# EAGLE board Select Fire Rapidstrike (EAGLE 9.4.2)
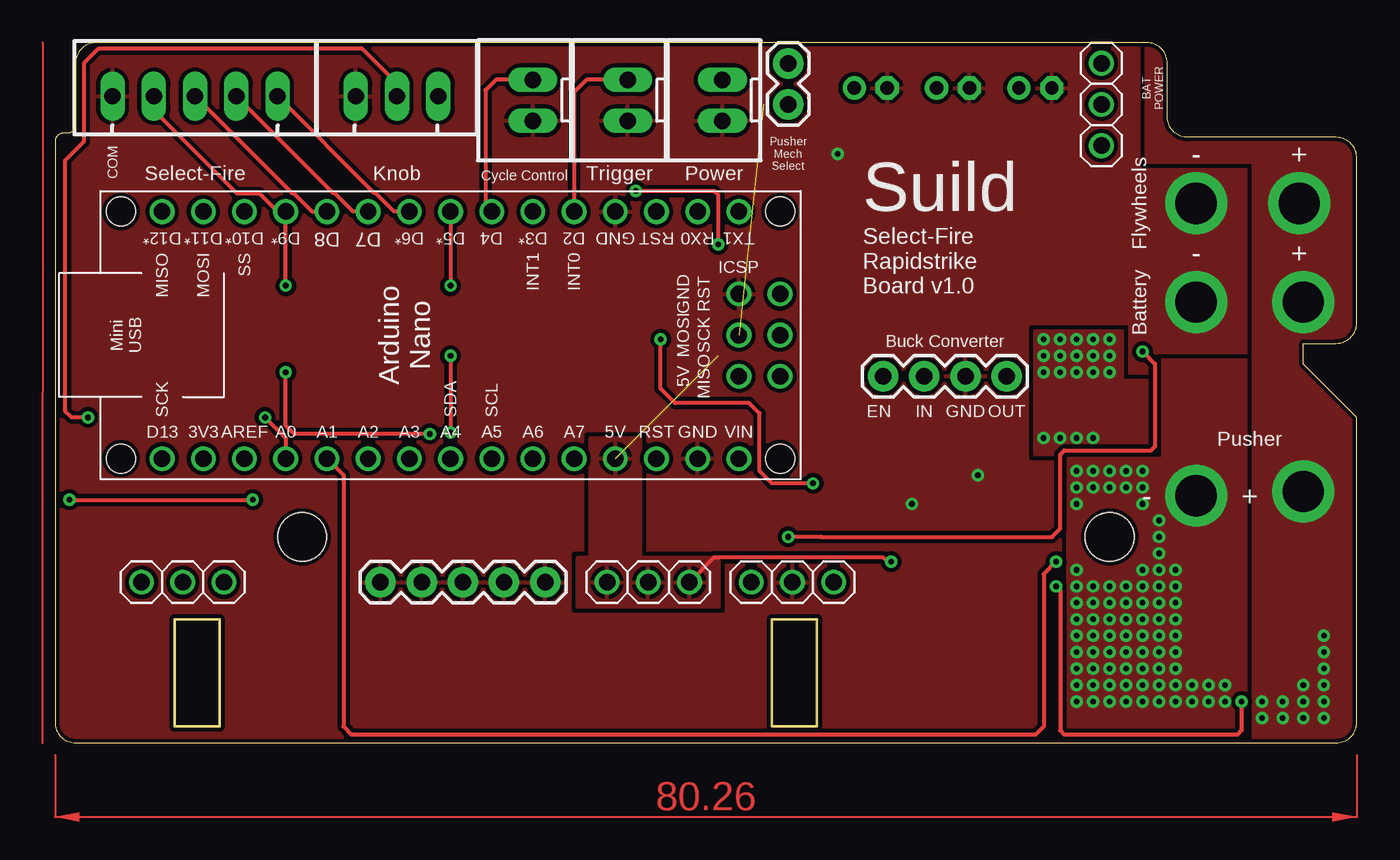
[diagram p0: board, top side]
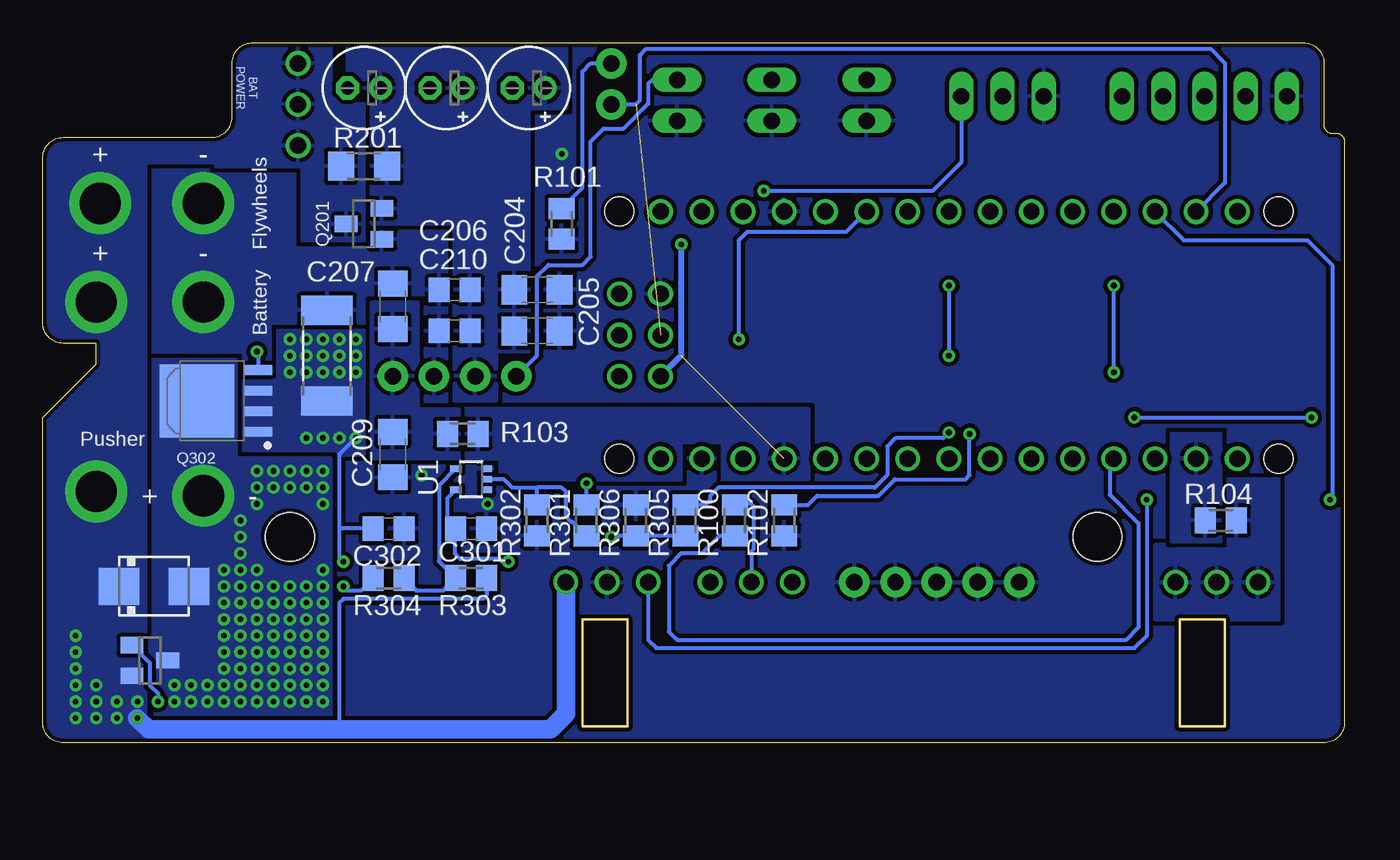
[diagram p1: board, bottom side, seen from below]

Size 80.26 x 43.18 mm. Coordinates in mm from the lower left corner, seen from the top.
Outline: 0.76,37.59 0.51,37.59 arc90 0,37.08 0,1.27 arc90 1.27,0 78.99,0 arc90 80.26,1.27 80.26,20.07 76.96,23.37 76.96,24.64 78.99,24.64 arc90 80.26,25.91 80.26,36.07 arc90 78.99,37.34 69.85,37.34 arc-90 68.58,38.61 68.58,41.91 arc90 67.31,43.18 2.54,43.18 arc90 1.27,41.91 1.27,38.1 arc-90 0.76,37.59
Outline: 7.37,7.62 10.16,7.62 10.16,1.02 7.37,1.02 7.37,7.62
Outline: 44.2,7.62 46.99,7.62 46.99,1.02 44.2,1.02 44.2,7.62
Copper layers (1*16): Top 0.035mm / dielectric 1.5mm / Bottom 0.035mm
Design rules "default *": minimum track width 10mil, minimum drill 0.35mm, track to track 10mil, track to pad 10mil, pad to pad 10mil, via to via 10mil, smd to smd 10mil, copper to edge 10mil, drill to drill 10mil, minimum pad ring 10mil, minimum via ring 8mil, stop-mask expansion 4mil, vias tented up to drill 30mil, thermal gap 10mil

## Footprints (pad centres in the part's own frame; a part is rotated, then mirrored left to right if it is on the bottom)
E2-5 = drill 0.813 pad 1.422: + -1.016,0 | drill 0.813 pad 1.422 octagon: - 1.016,0
C1206 = smd 1.6 x 1.8: 1 -1.4,0; 2 1.4,0
C0805 = smd 1.3 x 1.5: 1 -0.95,0; 2 0.95,0
DO214AA = smd 2.5 x 2.3: A 2.15,0; C -2.15,0
MOUNT-HOLE-2.5MM = drill 2.54 pad 3.81: P$1 0,0
UNPLATED_MOUNT_HOLE_3MM = hole 3: 0,0
1X04 = drill 1.016 pad 1.88: 1 0,0; 2 2.54,0; 3 5.08,0; 4 7.62,0
JST-XH-02-PACKAGE-LONG-PAD = drill 1.016 long: 1 -1.27,0; 2 1.27,0
JST-XH-03-PACKAGE-LONG-PAD = drill 1.016 long: 1 -2.54,0; 2 0,0; 3 2.54,0
JST-XH-05-PACKAGE-LONG-PAD = drill 1.016 long: 1 -5.08,0; 2 -2.54,0; 3 0,0; 4 2.54,0; 5 5.08,0
1X02 = drill 1.016 pad 1.88: 1 0,0; 2 2.54,0
1X03 = drill 1.016: 1 -2.54,0; 2 0,0; 3 2.54,0
1X05 = drill 1.016 pad 1.88: 1 0,0; 2 2.54,0; 3 5.08,0; 4 7.62,0; 5 10.16,0
SOT-23 = smd 1 x 1.4: 1 -0.95,-1.1; 2 0.95,-1.1; 3 0,1.1
TO127P600X120-5N = smd 1.65 x 0.6: 1 -2.65,1.905; 2 -2.65,0.635; 3 -2.65,-0.635; 4 -2.65,-1.905 | smd 4.6 x 4.5: 5 1.15,0
M0805 = smd 1.3 x 1.6: 1 -0.95,0; 2 0.95,0
R1206 = smd 1.6 x 1.803: 1 -1.422,0; 2 1.422,0
R2512 = smd 1.8 x 3.2: 1 -2.8,0; 2 2.8,0
SOT353 = smd 0.42 x 0.7: 1 -0.65,-0.95; 2 0,-0.95; 3 0.65,-0.95; 4 0.65,0.95; 5 -0.65,0.95
ARDUINO_NANO = drill 1.016: P1 -7.62,16.51; P2 -7.62,13.97; P3 -7.62,11.43; P4 -7.62,8.89; P5 -7.62,6.35; P6 -7.62,3.81; P7 -7.62,1.27; P8 -7.62,-1.27; P9 -7.62,-3.81; P10 -7.62,-6.35; P11 -7.62,-8.89; P12 -7.62,-11.43; P13 -7.62,-13.97; P14 -7.62,-16.51; P15 -7.62,-19.05; P16 7.62,-19.05; P17 7.62,-16.51; P18 7.62,-13.97; P19 7.62,-11.43; P20 7.62,-8.89; P21 7.62,-6.35; P22 7.62,-3.81; P23 7.62,-1.27; P24 7.62,1.27; P25 7.62,3.81; P26 7.62,6.35; P27 7.62,8.89; P28 7.62,11.43; P29 7.62,13.97; P30 7.62,16.51; P31 -2.54,19.05; P32 -2.54,16.51; P33 0,19.05; P34 0,16.51; P35 2.54,19.05; P36 2.54,16.51 | hole 1.778: -7.62,19.05; 7.62,19.05; -7.62,-21.59; 7.62,-21.59

## Placement (x,y rotation side)
C201  47uF  [E2-5]  60.45,40.39 180 bottom
C202  47uF  [E2-5]  55.37,40.39 180 bottom
C203  47uF  [E2-5]  50.29,40.39 180 bottom
C204  10uF  [C1206]  49.78,27.94 0 bottom
C205  10uF  [C1206]  49.78,25.4 0 bottom
C206  1uF  [C0805]  54.86,27.94 180 bottom
C207  10uF  [C1206]  58.67,26.92 90 bottom
C209  10uF  [C1206]  58.67,17.78 270 bottom
C210  0.1uF  [C0805]  54.86,25.4 180 bottom
C301  0.1uF  [C0805]  53.85,13.21 0 bottom
C302  0.1uF  [C0805]  58.93,13.21 0 bottom
D301  [DO214AA]  73.41,9.65 0 bottom
H1  B+  [MOUNT-HOLE-2.5MM]  76.71,33.27 0 top
H2  B-  [MOUNT-HOLE-2.5MM]  70.36,27.18 0 top
H3  M+  [MOUNT-HOLE-2.5MM]  76.96,15.49 0 bottom
H4  M+  [MOUNT-HOLE-2.5MM]  70.36,33.27 0 top
H0205  UNPLATED_MOUNT_HOLE_3MM  [UNPLATED_MOUNT_HOLE_3MM]  65.02,12.7 0 top
H0206  UNPLATED_MOUNT_HOLE_3MM  [UNPLATED_MOUNT_HOLE_3MM]  15.24,12.7 0 top
H0301  M+  [MOUNT-HOLE-2.5MM]  76.96,27.18 0 top
H308  M-  [MOUNT-HOLE-2.5MM]  70.36,15.24 0 top
J1  BUCK  [1X04]  51.05,22.61 0 top
J2  POWER  [JST-XH-02-PACKAGE-LONG-PAD]  41.15,39.62 90 top
J3  POT  [JST-XH-03-PACKAGE-LONG-PAD]  21.08,39.88 0 top
J4  TRIGGER  [JST-XH-02-PACKAGE-LONG-PAD]  35.31,39.62 90 top
J5  CYCLE CONTROL  [JST-XH-02-PACKAGE-LONG-PAD]  29.46,39.62 90 top
J6  SELECT FIRE  [JST-XH-05-PACKAGE-LONG-PAD]  8.64,39.88 0 top
J7  PUSHER MECH SEL  [1X02]  45.21,41.91 270 top
J8  [1X03]  45.47,9.91 180 top
J0206  [1X03]  64.52,39.37 270 top
J0208  [1X03]  36.58,9.91 180 top
J0209  [1X03]  7.87,9.91 0 top
J0210  [1X05]  20.07,9.91 0 top
Q201  SSM3J358RLFCT-ND  [SOT-23]  60.45,32 90 bottom
Q301  SSM3J358RLFCT-ND  [SOT-23]  73.66,5.08 270 bottom
Q302  PSMN1R5-30YLC  [TO127P600X120-5N]  69.6,21.08 180 bottom
R100  470k  [M0805]  37.59,13.72 90 bottom
R101  10k  [M0805]  48.26,32 90 bottom
R102  2.2k  [M0805]  34.54,13.72 90 bottom
R103  0  [M0805]  54.36,19.05 0 bottom
R104  0  [M0805]  7.62,13.72 0 bottom
R201  0  [R1206]  60.45,35.56 0 bottom
R301  100  [M0805]  46.74,13.72 270 bottom
R302  2.2k  [M0805]  49.78,13.72 90 bottom
R303  2.2k  [M0805]  53.85,10.16 0 bottom
R304  100  [M0805]  58.93,10.16 180 bottom
R305  100  [M0805]  40.64,13.72 270 bottom
R306  2.2k  [M0805]  43.69,13.72 270 bottom
R307  0.01  [R2512]  62.74,23.88 270 bottom
U1  74LVC1G07""  [SOT353]  53.85,16.26 90 bottom
U2  ARDUINO_NANO  [ARDUINO_NANO]  25.65,25.15 270 top

## Library data of the parts
C201-C203 J8 J0206 J0208 J0209 R100-R104 R301-R306 = adafruit
C204 C205 C207 C209 = eagle-ltspice; SPICEMODEL: NONE; SPICEPREFIX: C
C206 C210 C301 C302 = rcl; SPICEPREFIX: C
D301 = s2x_10; MF: Fairchild; MPN: S2A; OC_FARNELL: 1467485; OC_NEWARK: 58K2391
H1-H4 H0205 H0206 H0301 H308 Q302 U1 U2 = my-eagle-lib
J1 = SparkFun-Connectors; PROD_ID: CONN-09696
J2-J6 = Rembrandt Electronics - JST XH Connectors v1-0
J7 J0210 = SparkFun-Connectors
Q201 Q301 = bt_transistor
R201 = adafruit; STUFF: NO STUFF
R307 = adafruit; POWER: 2W

## Nets
BUCK_EN: J1.1 J2.2
CYC_CTRL_IN: J5.2 U2.P7
GND: C201.- C202.- C203.- C204.2 C205.2 C206.2 C207.2 C209.2 C210.2 C301.2 C302.2 H2.P$1 H4.P$1 J1.3 J2.1 J3.1 J4.1 J5.1 J6.1 J8.2 J0210.1 J0210.2 J0210.3 J0210.4 J0210.5 Q201.1 R101.1 R102.1 R302.1 R306.1 R307.1 U1.3 U2.P4 U2.P29 U2.P32
HI_SIDE_GATE: Q301.1 R304.2
HI_SIDE_GATE_R: R303.1 R304.1 U1.4
I_SENSE: C302.1 Q302.1 Q302.2 Q302.3 R307.2 U2.P20
LOW_SIDE_GATE: Q302.4 R305.2 R306.2
MOSFET_BOARD_GATE: J8.3 U2.P13
MOTOR_BRAKE: R301.1 U2.P6
MOTOR_DRIVE: R305.1 U2.P8
POT_IN: J3.2 R100.1 U2.P19
PP3V3_AR: J0209.1 J0209.2 J0209.3 R104.2
PP3V3_AR_R: R104.1 U2.P17
PP5V0_AR: C301.1 J3.3 J0208.1 J0208.2 J0208.3 R100.2 R103.2 U1.5 U2.P27 U2.P36
PP5V0_BUCK: C207.1 C209.1 J1.4 R103.1
PP_BATT_MAIN: C201.+ C202.+ C203.+ C204.1 C205.1 C206.1 C210.1 J1.2 Q201.2 R201.2
PP_BATT_RAW: D301.C H1.P$1 H3.P$1 H0301.P$1 J8.1 J0206.1 J0206.2 J0206.3 Q201.3 Q301.2 R201.1 R303.2
PUSHER_MECH_SEL: J7.2 U2.P14 U2.P34
PUSHER_MECH_SEL_PD: J7.1 R101.2
PUSHER_NEG: D301.A H308.P$1 Q301.3 Q302.5
SEL_FR_<0>: J6.5 U2.P9
SEL_FR_<1>: J6.4 U2.P10
SEL_FR_<2>: J6.3 U2.P11
SEL_FR_<3>: J6.2 R102.2 U2.P12
TRIG_IN: J4.2 U2.P5
U1_IN: R301.2 R302.2 U1.2

## Tracks (layer width: path | path; a pad name or v marks a point on that pad's centre or on a via)
BUCK_EN
  Bottom 0.254: J1.1 49.78,23.88 49.78,28.78 49.09,29.47 46.99,29.47 46.48,29.98 46.48,37.08 45.68,37.89 44.45,37.89 42.93,39.41 42.93,40.64 42.67,40.89 J2.2
CYC_CTRL_IN
  Top 0.254: J5.2 27.18,40.89 26.54,40.26 26.54,33.15 U2.P7
GND  (via drill 0.35)
  other vias: 52.83,14.73 56.9,16.51 48.26,36.32
  pour Top (rank 6): -3.56,-3.56 -3.56,48.26 87.88,48.26 87.88,-3.56
  pour Bottom (rank 6): -3.81,48.51 88.14,48.51 88.14,-3.81 -3.81,-3.81
  pour Bottom (rank 6, no thermals): 70.36,24.89 68.07,24.89 68.07,35.56 73.66,35.56 73.66,24.89
  pour Top (rank 6, no thermals): 68.07,24.89 73.66,24.89 73.66,35.56 68.07,35.56
HI_SIDE_GATE  (via drill 0.35)
  Top 0.254: v73.15,2.54 73.15,0.76 72.9,0.51 62.23,0.51 61.98,0.76 61.98,9.4 v61.72,9.65
  Bottom 0.254: Q301.1 73.66,4.93 73.66,3.56 73.15,3.05 v73.15,2.54 | R304.2 60.64,9.4 61.47,9.4 v61.72,9.65
HI_SIDE_GATE_R
  Bottom 0.254: R304.1 57.22,9.4 55.56,9.4 R303.1 55.83,11.19 55.83,15.88 U1.4
I_SENSE  (via drill 0.35)
  Top 0.254: v61.72,11.18 60.96,10.41 60.96,1.02 60.45,0.51 18.29,0.51 17.78,1.02 17.78,16.51 U2.P20
  Bottom 0.254: 61.98,13.27 61.91,13.21 C302.1 | 61.98,13.27 61.98,17.78 v60.96,18.8 | v61.72,11.18 61.98,11.43 61.98,13.27
  other vias: 61.98,18.8 62.99,18.8 64.01,18.8 65.02,24.89 65.02,23.88 65.02,22.86 64.01,24.89 64.01,23.88 64.01,22.86 62.99,24.89 62.99,23.88 62.99,22.86 61.98,24.89 61.98,23.88 61.98,22.86 60.96,24.89 60.96,23.88 60.96,22.86
  pour Bottom (rank 3, no thermals): 68.07,22.35 68.07,17.78 60.45,17.78 60.45,25.4 65.79,25.4 65.79,22.35
  pour Top (rank 3, no thermals): 60.45,25.4 65.79,25.4 65.79,22.35 68.07,22.35 68.07,17.78 60.45,17.78
LOW_SIDE_GATE  (via drill 0.35)
  Top 0.254: v67.06,24.13 67.82,23.37 67.82,18.29 67.56,18.03 62.23,18.03 61.98,17.78 61.98,13.21 61.46,12.7 47.24,12.7 v45.21,12.7
  Bottom 0.254: Q302.4 66.95,24.02 v67.06,24.13 | v45.21,12.7 45.15,12.77 R306.2 R305.2
MOSFET_BOARD_GATE  (via drill 0.35)
  Top 0.254: v0.89,14.99 v12.19,14.99
  Bottom 0.254: J8.3 42.93,6.35 42.42,5.84 12.95,5.84 12.19,6.6 v12.19,14.99 | U2.P13 9.91,30.99 2.29,30.99 0.76,29.46 0.76,15.11 v0.89,14.99
MOTOR_BRAKE  (via drill 0.35)
  Top 0.254: v46.74,16 44.2,16 43.43,16.76 43.43,20.32 42.8,20.95 38.23,20.95 37.34,21.84 v37.34,24.89
  Bottom 0.254: U2.P6 30.73,31.5 36.83,31.5 37.34,30.99 v37.34,24.89 | R301.1 v46.74,16
MOTOR_DRIVE  (via drill 0.35)
  Top 0.254: U2.P8 v24.38,28.19 | v24.38,23.88 v24.38,19.14
  Bottom 0.254: v24.38,19.14 24.73,18.8 27.69,18.8 28.19,18.29 28.19,16.51 28.96,15.75 38.61,15.75 39.12,15.24 39.12,14.99 39.44,14.67 R305.1 | v24.38,28.19 v24.38,23.88
POT_IN  (via drill 0.35)
  Top 0.254: J3.2 21.08,40.64 18.92,42.8 2.67,42.8 1.78,41.91 1.78,37.08 0.64,35.94 0.64,20.45 1.02,20.07 v2.03,20.07 | v12.95,20.07 14.22,18.8 U2.P19
  Bottom 0.254: v12.95,20.07 v2.03,20.07 | R100.1 38.54,12.77 39.62,11.68 40.89,11.68 41.66,10.92 41.66,6.86 41.15,6.35 13.46,6.35 12.7,7.11 12.7,13.54 14.48,15.31 14.48,17.27 U2.P19
PP3V3_AR
  pour Bottom (rank 2): 7.37,12.19 11.68,12.19 11.68,7.62 4.06,7.62 4.06,16.26 7.37,16.26
PP3V3_AR_R
  pour Bottom: 7.62,12.45 7.62,19.05 10.67,19.05 10.67,12.45
PP5V0_AR  (via drill 0.35)  (1 unrouted)
  Top 0.254: v40.89,30.73 40.89,33.78 40.64,34.04 v35.81,34.04 | J0208.1 40.64,11.43 51.05,11.43 51.31,11.18 v51.56,11.18
  Bottom 0.254: J3.3 23.62,35.81 25.4,34.04 v35.81,34.04 | 54.86,15.54 U1.5 | C301.1 54.83,13.17 | 54.83,13.17 54.86,13.14 55.32,13.6 55.32,15.08 U1.5 | 54.83,13.17 54.83,11.65 54.52,11.34 52.09,11.34 51.92,11.18 v51.56,11.18 | U1.5 54.83,15.57 | J0208.2 36.58,11.79 36.41,11.96 36.41,14.57 36.58,14.73 37.53,14.73 R100.2
  Bottom 0.381: v40.89,30.73 40.89,23.88 U2.P36
  pour Top (rank 2): 40.89,8.38 32.26,8.38 32.26,11.43 33.02,11.43 33.02,18.8 36.07,18.8 36.07,11.43 40.89,11.43
  pour Bottom (rank 3): 54.36,20.57 54.36,17.53 52.07,17.53 52.07,16.26 40.89,16.26 40.89,18.54 38.35,18.54 38.35,16.26 33.02,16.26 33.02,20.57
PP5V0_BUCK
  pour Bottom (rank 2): 54.61,20.57 54.61,17.53 59.94,17.53 59.94,27.18 57.15,27.18 57.15,20.57
PP_BATT_MAIN
  pour Bottom (rank 2): 52.32,24.13 52.32,21.08 54.86,21.08 54.86,32 59.94,32 59.94,39.88 60.45,39.88 60.45,40.89 60.96,41.4 61.47,41.4 61.47,44.2 48.01,44.2 48.01,39.12 50.29,39.12 50.29,24.13
PP_BATT_RAW  (via drill 0.35)
  Bottom 0.254: R303.2 52.9,9.08 53.09,8.89 61.72,8.89 61.98,8.64 61.98,0.82
  Bottom 1.143: v74.42,1.52 73.72,0.82 61.98,0.82 48.96,0.82 48.01,1.78 J8.1
  other vias: 78.23,6.6 78.23,5.59 78.23,4.57 78.23,3.56 78.23,2.54 78.23,1.52 76.96,3.56 76.96,2.54 76.96,1.52 75.69,2.54 75.69,1.52 74.42,2.54
  pour Bottom: 62.48,46.74 69.6,46.74 69.6,35.56 64.52,35.56 64.26,35.56 64.26,30.99 60.45,30.99 60.45,39.37 61.72,39.37 62.48,40.13
  pour Bottom (no thermals): 84.07,46.74 84.07,-2.79 73.91,-2.79 73.91,35.81 67.31,35.81 67.31,46.74
  pour Top (no thermals): 67.31,46.74 84.07,46.74 84.07,-2.79 73.91,-2.79 73.91,35.81 67.31,35.81
PUSHER_MECH_SEL  (1 unrouted)
  Bottom 0.254: J7.2 43.69,39.37 43.43,39.62 43.43,42.42 43.05,42.8 8.25,42.8 7.37,41.91 7.37,34.54 U2.P14
PUSHER_MECH_SEL_PD
  Bottom 0.254: R101.2 46.99,34.22 46.99,41.4 46.48,41.91 J7.1
PUSHER_NEG  (via drill 0.35)
  other vias: 68.07,9.65 67.06,16.76 68.07,12.7 67.06,14.73 67.06,15.75 68.07,10.67 67.06,9.65 67.06,10.67 66.04,9.65 68.07,11.68 64.01,16.76 62.99,16.76 62.99,15.75 64.01,15.75 66.04,15.75 66.04,16.76 65.02,16.76 65.02,15.75 68.07,13.72 67.06,8.64 68.07,7.62 68.07,8.64 67.06,7.62 66.04,8.64 66.04,7.62 68.07,6.6 68.07,5.59 66.04,5.59 66.04,6.6 67.06,6.6 67.06,5.59 65.02,9.65 64.01,9.65 62.99,9.65 64.01,8.64 65.02,7.62 65.02,8.64 64.01,7.62 62.99,8.64 62.99,7.62 65.02,6.6 65.02,5.59 62.99,5.59 62.99,6.6 64.01,6.6 64.01,5.59 68.07,4.57 66.04,4.57 67.06,4.57 65.02,4.57 62.99,4.57 64.01,4.57 69.09,7.62 69.09,5.59 69.09,6.6 69.09,4.57 69.09,9.65 69.09,10.67 69.09,8.64 62.99,10.67 62.99,14.73 70.1,3.56 70.1,2.54 71.12,3.56 71.12,2.54 68.07,3.56 66.04,3.56 67.06,3.56 65.02,3.56 62.99,3.56 64.01,3.56 68.07,2.54 66.04,2.54 67.06,2.54 65.02,2.54 62.99,2.54 64.01,2.54 69.09,3.56 69.09,2.54 72.14,3.56 72.14,2.54
  pour Bottom (rank 2, no thermals): 68.33,23.62 73.66,23.62 73.66,-2.54 62.48,-2.54 62.48,17.53 68.33,17.53
  pour Top (rank 2, no thermals): 68.33,23.62 73.66,23.62 73.66,-2.79 62.48,-2.79 62.48,17.53 68.33,17.53
SEL_FR_<0>
  Top 0.254: U2.P9 20.92,32.77 19.78,33.91 19.69,33.91 J6.5
SEL_FR_<1>
  Top 0.254: U2.P10 18.38,32.77 17.24,33.91 17.14,33.91 J6.4
SEL_FR_<2>
  Top 0.254: J6.3 14.61,33.91 14.7,33.91 15.84,32.77 U2.P11
SEL_FR_<3>  (via drill 0.35)
  Top 0.254: J6.2 6.1,39.02 11.21,33.91 12.57,33.91 13.72,32.77 U2.P12 v14.22,28.19 | v23.11,19.05 14.73,19.05 14.22,19.56 v14.22,22.86
  Bottom 0.254: v14.22,22.86 v14.22,28.19 | R102.2 33.09,14.67 32.51,15.24 28.75,15.24 27.73,16.26 23.37,16.26 23.11,16.51 v23.11,19.05
TRIG_IN
  Top 0.254: J4.2 32.77,40.89 32,40.13 U2.P5
U1_IN
  Bottom 0.254: R302.2 49.78,15.75 | U1.2 51.82,16.26 51.31,15.75 49.78,15.75 | R301.2 47.6,13.63 47.69,13.63 48.01,13.95 48.01,15.49 48.26,15.75 49.78,15.75
(copper drawn outside any net)
  shapes: Top area x2

## Text on the board
tNames: BAT / POWER | Pusher / Mech / Select | COM | - | + | Select-Fire | Knob | Cycle Control | Trigger | Power | Flywheels | Suild | - | + | Select-Fire / Rapidstrike / Board v1.0 | Battery | Buck Converter | EN | IN | GND | OUT | Pusher | - | +
bNames: BAT / POWER | - | + | Flywheels | - | + | Battery | Pusher | - | +